# EAGLE board iPad_adapt_board (EAGLE 6.5.0)
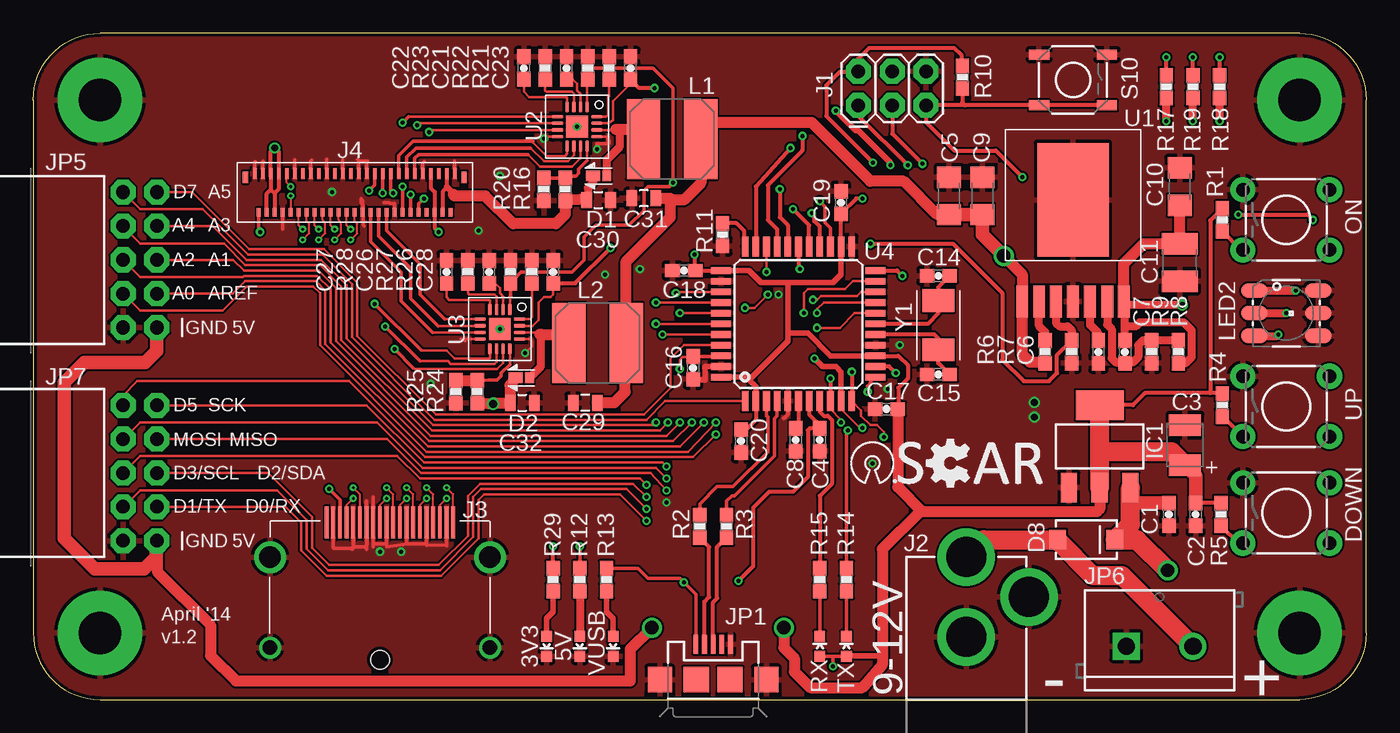
[diagram p0: board, top side]
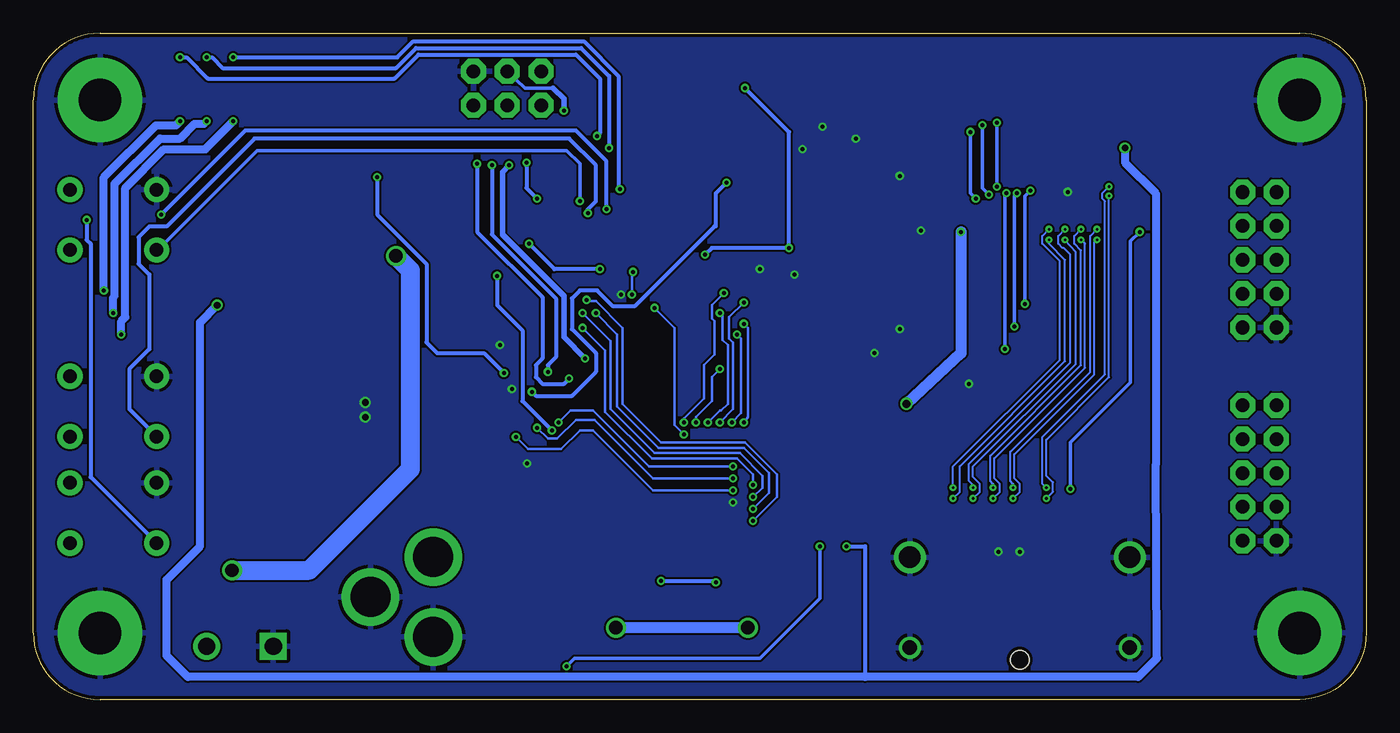
[diagram p1: board, bottom side, seen from below]

Size 100 x 50 mm. Coordinates in mm from the lower left corner, seen from the top.
Outline: 5,0 95,0 arc90 100,5 100,45 arc90 95,50 5,50 arc90 0,45 0,5 arc90 5,0
Copper layers (1*16): Top 0.035mm / dielectric 1.5mm / Bottom 0.035mm
Design rules "SeeedStudio_2layer_DRU_no_angle_20140221 *": minimum track width 0.15mm, minimum drill 7mil, track to track 0.15mm, track to pad 0.15mm, pad to pad 0.15mm, via to via 0.15mm, smd to smd 0mil, copper to edge 10mil, drill to drill 10mil, minimum pad ring 10mil, minimum via ring 6mil, stop-mask expansion 2mil, vias tented up to drill 100mil, thermal gap 10mil

## Footprints (pad centres in the part's own frame; a part is rotated, then mirrored left to right if it is on the bottom)
0603-CAP = smd 1.1 x 1: 1 -0.85,0; 2 0.85,0
SMC_B = smd 1.6 x 2.4: + -1.5,0; - 1.5,0
1206 = smd 1.6 x 1.8: 1 -1.4,0; 2 1.4,0
C1210 = smd 1.6 x 2.7: 1 -1.4,0; 2 1.4,0
0805 = smd 0.8 x 1.2: 1 -0.9,0; 2 0.9,0
SOD1608 = smd 0.65 x 0.8: A -0.625,0 | smd 1.05 x 0.8: C 0.425,0
LED-0603 = smd 0.8 x 0.8: A 0,-0.75; C 0,0.75
SMA-DIODE = smd 1.27 x 1.47: A -2.15,0; C 2.15,0
TACTILE-PTH = drill 1.016 pad 1.88: 1 -3.251,2.261; 2 3.251,2.261; 3 -3.251,-2.261; 4 3.251,-2.261
SOT223 = smd 1.219 x 2.235: 1 -2.311,-3.099; 2 0,-3.099; 3 2.311,-3.099 | smd 3.6 x 2.2: 4 0,3.099
2X3 = drill 1.016 pad 1.88 octagon: 1 0,0; 2 0,2.54; 3 2.54,0; 4 2.54,2.54; 5 5.08,0; 6 5.08,2.54
POWER_JACK_PTH = drill 2.997 pad 4.318: GND 0,7.7; GNDBREAK 4.7,10.7; PWR 0,13.7
DP = smd 0.28 x 2.4: 1 5.5,10.28; 2 5,10.28; 3 4.5,10.28; 4 4,10.28; 5 3.5,10.28; 6 3,10.28; 7 2.5,10.28; 8 2,10.28; 9 1.5,10.28; 10 1,10.28; 11 0.5,10.28; 12 0,10.28; 13 -0.5,10.28; 14 -1,10.28; 15 -1.5,10.28; 16 -2,10.28; 17 -2.5,10.28; 18 -3,10.28; 19 -3.5,10.28; 20 -4,10.28 | drill 1.6: SHIELD1 -8.25,7.68; SHIELD2 8.25,7.68 | drill 1.1: SHIELD3 8.25,0.9; SHIELD4 -8.25,0.9 | hole 1.4: 0,0
MOLEX502250-5191 = smd 0.26 x 0.8: P1 7.485,-1.47; P3 6.885,-1.47; P5 6.285,-1.47; P7 5.685,-1.47; P9 5.085,-1.47; P11 4.485,-1.47; P13 3.885,-1.47; P15 3.285,-1.47; P17 2.685,-1.47; P19 2.085,-1.47; P21 1.485,-1.47; P23 0.885,-1.47; P25 0.285,-1.47; P27 -0.315,-1.47; P29 -0.915,-1.47; P31 -1.515,-1.47; P33 -2.115,-1.47; P35 -2.715,-1.47; P37 -3.315,-1.47; P39 -3.915,-1.47; P41 -4.515,-1.47; P43 -5.115,-1.47; P45 -5.715,-1.47; P47 -6.315,-1.47; P49 -6.915,-1.47; P51 -7.515,-1.47 | smd 0.3 x 0.65: P2 7.185,1.43; P4 6.585,1.43; P6 5.985,1.43; P8 5.385,1.43; P10 4.785,1.43; P12 4.185,1.43; P14 3.585,1.43; P16 2.985,1.43; P18 2.385,1.43; P20 1.785,1.43; P22 1.185,1.43; P24 0.585,1.43; P26 -0.015,1.43; P28 -0.615,1.43; P30 -1.215,1.43; P32 -1.815,1.43; P34 -2.415,1.43; P36 -3.015,1.43; P38 -3.615,1.43; P40 -4.215,1.43; P42 -4.815,1.43; P44 -5.415,1.43; P46 -6.015,1.43; P48 -6.615,1.43; P50 -7.215,1.43 | smd 0.4 x 0.85: P$1 -8.215,-1.195; P$2 8.185,-1.195
USB-MICROB = smd 0.35 x 1.4: D+ 0,2.65; D- -0.65,2.65; GND 1.3,2.65; ID 0.65,2.65; VBUS -1.3,2.65 | smd 1.8 x 1.9: MT1 -4,0; MT2 4,0 | smd 1.9 x 1.9: P$1 -1.27,0; P$2 1.27,0
2X5-RAF = drill 1.016 pad 1.88 octagon: 1 -1.27,5.08; 2 1.27,5.08; 3 -1.27,2.54; 4 1.27,2.54; 5 -1.27,0; 6 1.27,0; 7 -1.27,-2.54; 8 1.27,-2.54; 9 -1.27,-5.08; 10 1.27,-5.08
SCREWTERMINAL-5MM-2 = drill 1.3 pad 2.032 square: 1 0,0 | drill 1.3 pad 2.032: 2 5,0
SRN6045 = smd 2.5 x 6: 1 -2.175,-0.175; 2 2.125,-0.175
LED-TRICOLOR-5050 = smd 2 x 1.1: 1 -2.4,1.7; 2 -2.4,0; 3 -2.4,-1.7; 4 2.4,-1.7; 5 2.4,0; 6 2.4,1.7
0603-RES = smd 1.1 x 1: 1 -0.85,0; 2 0.85,0
STANDOFF-ELECTRICAL = drill 3.2 pad 6.35: P1 0,0
TACTILE_SWITCH_SMD = smd 1.524 x 0.762: 1 -2.54,1.905; 2 2.54,1.905; 3 -2.54,-1.905; 4 2.54,-1.905
TO-PMOD-7 = smd 0.89 x 2.41: 1 -3.81,-7.63; 2 -2.54,-7.63; 3 -1.27,-7.63; 4 0,-7.63; 5 1.27,-7.63; 6 2.57,-7.63; 7 3.81,-7.63 | smd 5.35 x 8.54: EP 0,0
QFN16 = smd 0.85 x 0.28: 1 -1.475,0.75; 2 -1.475,0.25; 3 -1.475,-0.25; 4 -1.475,-0.75; 9 1.475,-0.75; 10 1.475,-0.25; 11 1.475,0.25; 12 1.475,0.75 | smd 0.28 x 0.85: 5 -0.75,-1.475; 6 -0.25,-1.475; 7 0.25,-1.475; 8 0.75,-1.475; 13 0.75,1.475; 14 0.25,1.475; 15 -0.25,1.475; 16 -0.75,1.475 | smd 1.626 x 1.626: PAD 0,0
SPARKFUN-DIGITALIC_TQFP44 = smd 1.5 x 0.5: 1 -5.8,4; 2 -5.8,3.2; 3 -5.8,2.4; 4 -5.8,1.6; 5 -5.8,0.8; 6 -5.8,0; 7 -5.8,-0.8; 8 -5.8,-1.6; 9 -5.8,-2.4; 10 -5.8,-3.2; 11 -5.8,-4; 23 5.8,-4; 24 5.8,-3.2; 25 5.8,-2.4; 26 5.8,-1.6; 27 5.8,-0.8; 28 5.8,0; 29 5.8,0.8; 30 5.8,1.6; 31 5.8,2.4; 32 5.8,3.2; 33 5.8,4 | smd 0.5 x 1.5: 12 -4,-5.8; 13 -3.2,-5.8; 14 -2.4,-5.8; 15 -1.6,-5.8; 16 -0.8,-5.8; 17 0,-5.8; 18 0.8,-5.8; 19 1.6,-5.8; 20 2.4,-5.8; 21 3.2,-5.8; 22 4,-5.8; 34 4,5.8; 35 3.2,5.8; 36 2.4,5.8; 37 1.6,5.8; 38 0.8,5.8; 39 0,5.8; 40 -0.8,5.8; 41 -1.6,5.8; 42 -2.4,5.8; 43 -3.2,5.8; 44 -4,5.8
CRYSTAL-TXC-7A = smd 1.7 x 2.4: P$1 1.85,0; P$2 -1.85,0

## Placement (x,y rotation side)
C1  0.1u  [0603-CAP]  85.2,13.9 270 top
C2  0.1u  [0603-CAP]  87.2,13.9 270 top
C3  22u  [SMC_B]  86.4,19.1 90 top
C4  0.1u  [0603-CAP]  59,19.5 270 top
C5  10u  [1206]  68.7,37.8 90 top
C6  0.022u  [0603-CAP]  79.9,26.1 270 top
C7  0.022u  [0603-CAP]  81.9,26.1 270 top
C8  0.1u  [0603-CAP]  57.2,19.5 90 top
C9  1u  [1206]  71.2,37.8 90 top
C10  1u  [1206]  86,38.5 90 top
C11  100u  [C1210]  86,32.8 270 top
C14  22p  [0603-CAP]  67.9,31.8 0 top
C15  22p  [0603-CAP]  67.9,24.4 0 top
C16  0.1u  [0603-CAP]  49.5,24.9 270 top
C17  1u  [0603-CAP]  64,21.8 180 top
C18  0.1u  [0603-CAP]  48.8,32.2 180 top
C19  0.1u  [0603-CAP]  60.6,37.3 90 top
C20  0.1u  [0603-CAP]  53.1,19.4 270 top
C21  1u  [0603-CAP]  40,47.4 90 top
C22  0.47u  [0603-CAP]  36.8,47.4 90 top
C23  1u  [0603-CAP]  44.8,47.4 90 top
C26  1u  [0603-CAP]  34.2,32.1 90 top
C27  0.47u  [0603-CAP]  31,32.1 90 top
C28  1u  [0603-CAP]  39,32.1 90 top
C29  2.2u  [0805]  41.4,22.27 180 top
C30  4.7u  [0805]  42.41,37.48 0 top
C31  2.2u  [0805]  45.81,37.62 180 top
C32  4.7u  [0805]  36.67,22.27 0 top
CC_TEXT1  CREATIVE_COMMONS  [CREATIVE_COMMONS]  0,0 0 top
D1  PMEG4010EPK  [SOD1608]  42.4,39.3 180 top
D2  PMEG4010EPK  [SOD1608]  36.6,24.15 180 top
D3  GREEN  [LED-0603]  41,4 180 top
D6  GREEN  [LED-0603]  43.5,4 180 top
D8  BA340A  [SMA-DIODE]  79,12 0 top
D9  YELLOW  [LED-0603]  59,4 0 top
D10  YELLOW  [LED-0603]  61,4 0 top
D11  GREEN  [LED-0603]  38.5,4 180 top
DOWN  SWITCH-MOMENTARY-2PTH  [TACTILE-PTH]  94,14 0 top
IC1  5V  [SOT223]  80,19 0 top
J1  AVR_SPI_PRG_6PTH  [2X3]  61.9,44.6 0 top
J2  POWER_JACKPTH  [POWER_JACK_PTH]  70,-3 0 top
J3  DP  [DP]  26,3 0 top
J4  IPAD3-CONN  [MOLEX502250-5191]  24.1,38 180 top
JP1  USB-MICROB  [USB-MICROB]  51,1.5 0 top
JP5  M05X2RAF  [2X5-RAF]  8,33 180 top
JP6  M025MM  [SCREWTERMINAL-5MM-2]  82,4 0 top
JP7  M05X2RAF  [2X5-RAF]  8,17 180 top
L1  4.7uH  [SRN6045]  47.9,41.9 180 top
L2  4.7uH  [SRN6045]  42.3,26.6 180 top
LED2  LED-TRICOLOR-5050NO_IC  [LED-TRICOLOR-5050]  94,29 0 top
ON  SWITCH-MOMENTARY-2PTH  [TACTILE-PTH]  94,36 0 top
R1  10k  [0603-RES]  89.2,36 90 top
R2  22  [0603-RES]  50,13 270 top
R3  22  [0603-RES]  52,13 270 top
R4  10k  [0603-RES]  89.2,22.1 90 top
R5  10k  [0603-RES]  89.1,13.9 90 top
R6  61.9k  [0603-RES]  75.9,26.1 90 top
R7  10k  [0603-RES]  77.9,26.1 90 top
R8  3.32k  [0603-RES]  85.9,26.1 270 top
R9  1.07k  [0603-RES]  83.9,26.1 90 top
R10  10k  [0603-RES]  69.7,46.7 90 top
R11  10k  [0603-RES]  51.7,34.9 90 top
R12  1k  [0603-RES]  41,9 90 top
R13  1k  [0603-RES]  43,9 90 top
R14  1k  [0603-RES]  61,9 90 top
R15  1k  [0603-RES]  59,9 90 top
R16  1M  [0603-RES]  39.9,38.3 270 top
R17  120  [0603-RES]  85,46 90 top
R18  120  [0603-RES]  89,46 90 top
R19  180  [0603-RES]  87,46 90 top
R20  43k  [0603-RES]  38.3,38.3 90 top
R21  1.3M  [0603-RES]  43.2,47.4 90 top
R22  10k  [0603-RES]  41.6,47.4 270 top
R23  57.6k  [0603-RES]  38.4,47.4 270 top
R24  1M  [0603-RES]  33.3,23.1 270 top
R25  43k  [0603-RES]  31.7,23.1 90 top
R26  1.3M  [0603-RES]  37.4,32.1 90 top
R27  10k  [0603-RES]  35.8,32.1 270 top
R28  57.6k  [0603-RES]  32.6,32.1 270 top
R29  560  [0603-RES]  39,9 90 top
S4  STANDOFF_ELECTRICAL  [STANDOFF-ELECTRICAL]  5,45 0 top
S5  STANDOFF_ELECTRICAL  [STANDOFF-ELECTRICAL]  95,45 0 top
S6  STANDOFF_ELECTRICAL  [STANDOFF-ELECTRICAL]  5,5 0 top
S7  STANDOFF_ELECTRICAL  [STANDOFF-ELECTRICAL]  95,5 0 top
S10  RESET  [TACTILE_SWITCH_SMD]  78,46.5 0 top
U1  LMZ12001  [TO-PMOD-7]  78,37.5 0 top
U2  TPS61176  [QFN16]  40.8,43 270 top
U3  TPS61176  [QFN16]  35,27.8 270 top
U4  ATMEGA32U4TQFP  [SPARKFUN-DIGITALIC_TQFP44]  57.4,28.2 90 top
UP  SWITCH-MOMENTARY-2PTH  [TACTILE-PTH]  94,22 0 top
Y1  16MHz  [CRYSTAL-TXC-7A]  67.9,28.1 270 top

## Library data of the parts
C1 C2 C4 C6-C8 C14-C23 C26-C28 R1-R29 = SparkFun-Passives
C3 C11 = rcl
C5 C9 C10 C29-C32 = SparkFun-Capacitors
CC_TEXT1 = SparkFun-Aesthetics
D1 D2 J3 U2 U3 = iPad_adap
D3 D6 D11 = SparkFun-LED; PROD_ID: DIO-00821
D8 = SparkFun-DiscreteSemi; PROD_ID: DIO-09886
D9 D10 = SparkFun-LED; PROD_ID: DIO-09003
DOWN ON S4-S7 UP = SparkFun-Electromechanical
IC1 U1 = SparkFun-PowerIC
J1 J2 JP5-JP7 = SparkFun-Connectors
J4 = con-ipad3
JP1 = SparkFun-Connectors; PROD_ID: CONN-09505
L1 L2 = SparkFun-Passives; PROD_ID: NDUC-11627
LED2 = SparkFun-LED
S10 = SparkFun-Electromechanical; PROD_ID: SWCH-08247
U4 = SparkFun-DigitalIC
Y1 = SparkFun-FreqCtrl

## Nets
0_N: J3.10 J4.P12
0_P: J3.12 J4.P14
1_N: J3.7 J4.P16
1_P: J3.9 J4.P18
2_N: J3.4 J4.P20
2_P: J3.6 J4.P22
3.3V: C7.1 C10.1 C11.1 J4.P4 J4.P5 J4.P6 J4.P7 R8.2 R29.2 U1.7
3_N: J3.1 J4.P24
3_P: J3.3 J4.P26
3V3_EN: R7.2 U1.3 U4.28
+5V: C2.1 C3.+ C17.1 C18.1 C19.1 C20.1 C23.1 C28.1 D9.A D10.A IC1.2 IC1.4 J1.2 JP5.1 JP7.1 R1.2 R4.2 R5.2 R10.2 R12.2 U2.15 U3.15 U4.2 U4.14 U4.24 U4.34 U4.44
A0: JP5.4 U4.36
A1: JP5.5 U4.37
A2: JP5.6 U4.38
A3: JP5.7 U4.39
A4: JP5.8 U4.40
A5: JP5.9 U4.41
AREF: C16.1 JP5.3 U4.42
AUX_N: J3.17 J4.P10
AUX_P: J3.15 J4.P9
BL_PWM: R22.2 R27.2 U2.1 U3.1 U4.12
D0/RX: JP7.3 U4.20
D1/TX: JP7.4 U4.21
D2/SDA: JP7.5 U4.19
D3/SCL: JP7.6 U4.18
D5: JP7.10 U4.31
D7: JP5.10 U4.1
D+: JP1.D+ R3.2
D-: JP1.D- R2.2
GND: C1.2 C2.2 C3.- C4.2 C5.2 C6.2 C8.1 C9.2 C10.2 C11.2 C14.1 C15.1 C16.2 C17.2 C18.2 C19.2 C20.2 C21.2 C22.2 C23.2 C26.2 C27.2 C28.2 C29.2 C30.2 C31.2 C32.2 D3.C D6.C D11.C DOWN.1 IC1.1 J1.6 J2.GND J2.GNDBREAK J3.2 J3.5 J3.8 J3.11 J3.13 J3.14 J3.16 J3.19 J3.SHIELD1 J3.SHIELD2 J3.SHIELD3 J3.SHIELD4 J4.P1 J4.P3 J4.P8 J4.P11 J4.P15 J4.P19 J4.P23 J4.P27 J4.P28 J4.P29 J4.P36 J4.P43 J4.P51 JP1.GND JP1.MT1 JP1.MT2 JP5.2 JP6.1 JP7.2 LED2.4 LED2.5 LED2.6 ON.1 R7.1 R9.1 R11.1 R20.1 R21.2 R22.1 R23.1 R25.1 R26.2 R27.1 R28.1 S4.P1 S5.P1 S6.P1 S7.P1 S10.1 S10.2 U1.4 U1.EP U2.8 U2.13 U2.PAD U3.8 U3.13 U3.PAD U4.5 U4.15 U4.23 U4.35 U4.43 UP.1
HPD: J3.18 J4.P2
LED_BLU: R17.2 U4.29
LED_GRN: R18.2 U4.30
LED_RED: R19.2 U4.32
MISO: J1.1 JP7.7 U4.11
MOSI: J1.4 JP7.8 U4.10
N$1: C6.1 U1.5
N$2: R6.2 U1.2
N$3: C7.2 R8.1 R9.2 U1.6
N$4: J4.P41 U2.11
N$5: C8.2 U4.6
N$6: C14.2 U4.17 Y1.P$2
N$7: J4.P39 U2.10
N$8: C15.2 U4.16 Y1.P$1
N$9: D3.A R12.1
N$10: D6.A R13.1
N$11: R11.2 U4.33
N$12: LED2.1 R18.1
N$13: D10.C R14.1
N$14: D9.C R15.1
N$15: R21.1 U2.16
N$16: LED2.3 R17.1
N$17: LED2.2 R19.1
N$18: D1.A L1.2 U2.14
N$19: C30.1 D1.C J4.P48 J4.P49 R16.2
N$20: R16.1 R20.2 U2.12
N$21: J4.P37 U2.9
N$22: C22.1 U2.4
N$23: R23.2 U2.3
N$24: J4.P42 U2.7
N$25: C21.1 U2.2
N$26: J4.P40 U2.6
N$27: J4.P38 U2.5
N$28: R26.1 U3.16
N$29: D2.A L2.2 U3.14
N$30: J4.P35 U3.11
N$31: R24.1 R25.2 U3.12
N$32: C27.1 U3.4
N$33: R28.2 U3.3
N$34: C26.1 U3.2
N$35: J4.P33 U3.10
N$36: J4.P31 U3.9
N$38: J4.P32 U3.6
N$39: J4.P34 U3.5
N$40: D11.A R29.1
N$41: C32.1 D2.C J4.P45 J4.P46 R24.2
N$42: D8.A J2.PWR JP6.2
N$44: J4.P30 U3.7
RD+: R3.1 U4.4
RD-: R2.1 U4.3
RESET: J1.5 R10.1 S10.3 S10.4 U4.13
RX_LED/SS: R15.2 U4.8
SCK: J1.3 JP7.9 U4.9
SW_1: ON.3 R1.1 U4.25
SW_2: R4.1 U4.26 UP.3
SW_3: DOWN.3 R5.1 U4.27
TX_LED: R14.2 U4.22
VIN: C1.1 C5.1 C9.1 C29.1 C31.1 D8.C IC1.3 L1.1 L2.1 R6.1 U1.1
VUSB: C4.1 JP1.VBUS R13.2 U4.7

## Tracks (layer width: path | path; a pad name or v marks a point on that pad's centre or on a via)
0_N  (via drill 0.2)
  Top 0.15: J3.10 27,15.4 v26.5,15.9 | v20.2,35.3 19.91,35.59 J4.P12
  Bottom 0.15: v26.5,15.9 26.5,16.2 26.7,16.4 26.7,18.6 20.7,24.6 20.7,34.8 v20.2,35.3
0_P  (via drill 0.2)
  Top 0.15: J3.12 26,14.6 v26.5,15.1 | v20.2,34.5 20.7,35 20.7,35.7 20.5,35.9 20.5,36.55 J4.P14
  Bottom 0.15: v26.5,15.1 26,15.6 26,16.2 26.4,16.6 26.4,18.4 20.4,24.4 20.4,34.3 v20.2,34.5
1_N  (via drill 0.2)
  Top 0.15: J3.7 28.5,15.4 v28,15.9 | v21.4,35.3 21.11,35.59 J4.P16
  Bottom 0.15: v28,15.9 28,16.2 28.2,16.4 28.2,18.3 21.4,25.1 21.4,33.7 21.9,34.2 21.9,34.8 v21.4,35.3
1_P  (via drill 0.2)
  Top 0.15: J3.9 27.5,14.6 v28,15.1 | v21.4,34.5 21.9,35 21.9,35.8 21.7,36 21.71,36.02 J4.P18
  Bottom 0.15: v28,15.1 27.5,15.6 27.5,16.2 27.9,16.6 27.9,18.1 21.1,24.9 21.1,34.2 v21.4,34.5
2_N  (via drill 0.2)
  Top 0.15: J3.4 30,15.4 v29.5,15.9 | v22.6,35.3 22.32,35.59 J4.P20
  Bottom 0.15: v29.5,15.9 29.5,16.1 29.8,16.4 29.8,17.7 22.2,25.3 22.2,33.4 22.7,33.9 22.8,33.9 23.1,34.2 23.1,34.8 v22.6,35.3
2_P  (via drill 0.2)
  Top 0.15: J3.6 29,14.6 v29.5,15.1 | v22.6,34.5 23.1,35 23.1,35.8 22.91,35.98 J4.P22
  Bottom 0.15: v29.5,15.1 29,15.6 29,16.2 29.5,16.7 29.5,17.5 21.8,25.2 21.8,33.6 v22.6,34.5
3.3V  (via drill 0.3, 0.5)
  Top 0.3: J4.P7 18.41,38.31 18.1,38 | 18.1,38 18.11,37.98 J4.P6 | J4.P5 17.82,38.28 | 17.82,38.28 18.1,38 | J4.P4 17.52,37.98 17.82,38.28
  Top 0.305: J4.P7 18.41,41.09 v18.1,41.4 17.8,41.1 17.8,39.3 | R29.2 v39,11.5
  Top 0.61: C7.1 81.9,27.9 | 81.9,27.9 81.9,29.78 U1.7 81.8,29.8 82,29.6 v86.2,29.6 | R8.2 86.45,25.25 86.9,25.7 86.9,27.7 86.3,28.3 83,28.3 82.7,28 82,28 81.9,27.9
  Top 0.813: U1.7 81.81,32.71 83.3,34.2 C11.1 C10.1
  Bottom 0.305: v39,11.5 37.6,11.5 37.6,1.7
  Bottom 0.61: v18.1,41.4 18.1,40.3 15.8,38 15.8,17.6 15.7,3.1 17.1,1.7 37.6,1.7 88.4,1.7 90,3.3 90,9 87.5,11.5 87.5,28.3 v86.2,29.6
3_N  (via drill 0.2)
  Top 0.15: J3.1 31.5,15.4 v31,15.9 | v23.8,35.3 23.52,35.59 J4.P24
  Bottom 0.15: v31,15.9 31,17.5 23,25.5 23,32.9 24.3,34.2 24.3,34.8 v23.8,35.3
3_P  (via drill 0.2)
  Top 0.15: J3.3 30.5,14.6 v31,15.1 | v23.8,34.5 23.8,34.47 24.3,34.97 24.3,35.7 24.11,35.88 J4.P26
  Bottom 0.15: v31,15.1 30.5,15.6 30.5,17.5 22.6,25.4 22.6,33 23.8,34.2 v23.8,34.5
3V3_EN  (via drill 0.3)
  Top 0.305: U4.28 57.4,32.4 v57.5,32.3 | v62.8,34.2 69,34.2 72.7,30.5 72.7,25.5 74.3,23.9 76.2,23.9 76.8,24.5 76.8,25.85 R7.2
  Top 0.61: U1.3 76.73,28.27 77,28 77.6,28 77.9,27.7 R7.2
  Bottom 0.305: v57.5,32.3 60.9,32.3 v62.8,34.2
+5V  (via drill 0.3, 1)
  Top 0.2: U2.15 43.15,43.25 43.5,43.5 43.5,44.9 44.8,46.2 | U3.15 37.45,28.05 37.9,28.5 37.9,29.8 38.3,30.2 38.8,30.2 39,30.4 C28.1
  Top 0.254: D10.A 60,3.25 | 60,3.25 D9.A | R12.2 v41,11.5 | v60,2.5 60,3.25 | 44.8,46.2 C23.1
  Top 0.305: 80,14.3 79.8,14.1 | 66.7,14.1 66.5,14.1 | 61.05,3.2 D10.A | R5.2 C2.1 | R4.2 89.15,23 88.3,23 | 88.3,23 83.4,23 82.5,22.1 IC1.4 | R1.2 88.3,35.95 88.3,23 | U4.2 54.2,21 53.45,20.25 C20.1 | U4.34 C18.1 49.6,32.25 v49.6,33.4 | U4.24 C19.1 61.75,37.6 v62.2,37.6 | R10.2 69.65,47.55 69.65,48.35 69.1,48.9 62.7,48.9 61.9,48.1 J1.2 61.86,47.1 60.5,47.1 59.5,46.1 59.5,43.8 v63,40.3 | U4.14 64.9,25.8 65.6,25.1 65.6,24.1 64.9,23.4 64.9,22.65 C17.1 | C28.1 40.65,31.25 v43.3,33.9 | v46.6,45.9 45.45,45.9 C23.1
  Top 0.406: U4.34 53.7,32.2 54.6,31.3 56.6,31.3 | 56.6,31.3 60,31.3 60.6,31.9 U4.24 | U4.14 59.8,25.8 58.1,27.5 56.6,27.5 | 56.6,27.5 56.6,31.3 | U4.44 53.5,24.2 53.7,24 | 53.7,24 54.2,23.5 U4.2 | 56.6,27.5 56.6,26.9 53.7,24 | 61,3.3 61.1,3.3 | 61.1,3.3 63.7,3.3 | D10.A 61.05,3.25 61.1,3.3
  Top 0.813: IC1.4 80,14.3 | 79.8,14.1 66.7,14.1 64.85,15.95 C17.1 | 66.5,14.1 63.7,11.3 63.7,3.3 63.7,2.6 62.3,1 62.2,0.9 58.3,0.9 57.1,2.1 57.1,3.1 56.3,3.9 v56.3,5.4 | JP7.1 9.29,11.9 9.3,11.9 9.3,9.6 13.3,5.6 13.3,3.3 15.2,1.4 44.8,1.4 44.8,3.8 v46.4,5.4
  Top 1.016: C2.1 87.2,16.8 C3.+ | JP5.1 9.27,26.17 8.4,25.3 3.8,25.3 2.3,23.8 2.3,12.1 4.6,9.8 8.3,9.8 9.2,10.7 9.2,11.85 JP7.1
  Top 1.422: IC1.2 80,18.6 | 80,18.6 IC1.4 | C3.+ 85.4,18.6 80,18.6
  Bottom 0.254: v41,11.5 41,7.6 45.5,3.1 59.4,3.1 v60,2.5
  Bottom 0.305: v63,40.3 63,38.4 v62.2,37.6 | v46.6,45.9 43.3,42.6 v43.3,33.9 49.1,33.9 v49.6,33.4
  Bottom 0.813: v46.4,5.4 v56.3,5.4
A0  (via drill 0.3)
  Top 0.2: JP5.4 8,29.2 14.2,29.2 16,31 21,31 21.5,30.5 21.5,26.6 29.5,18.6 49.1,18.6 v51.2,20.8 | v48.2,30.5 48.3,30.6 U4.36
  Bottom 0.2: v51.2,20.8 51.2,21.1 49.7,22.6 49.7,25.1 48.9,25.9 48.9,28.4 49.1,28.6 49.1,29.6 v48.2,30.5
A1  (via drill 0.3)
  Top 0.2: JP5.5 15,33 15.8,32.2 21.4,32.2 22.7,30.9 22.7,26.9 29.8,19.8 47.5,19.8 v48.5,20.8 | v46.7,29.8 U4.37
  Bottom 0.2: v48.5,20.8 47.5,21.8 47.5,26.8 47.8,27.1 47.8,28.7 v46.7,29.8
A2  (via drill 0.3)
  Top 0.2: JP5.6 6.73,32.97 8,31.7 15.7,31.7 15.8,31.8 21.3,31.8 22.3,30.8 22.3,26.8 29.7,19.4 48,19.4 v49.4,20.8 | v48.5,29 U4.38
  Bottom 0.2: v49.4,20.8 48.5,21.7 48.4,21.7 47.9,22.2 47.9,26.6 48.3,27 48.3,28.8 v48.5,29
A3  (via drill 0.3)
  Top 0.2: JP5.7 13.46,35.54 16,33 21.6,33 23.5,31.1 23.5,27.1 30,20.6 46.5,20.6 v46.7,20.8 | v46.7,28.2 U4.39
  Bottom 0.2: v46.7,20.8 46.4,21.2 46.4,27.9 v46.7,28.2
A4  (via drill 0.3)
  Top 0.2: JP5.8 6.73,35.47 8,34.2 14.3,34.2 15.9,32.6 21.5,32.6 23.1,31 23.1,27 29.9,20.2 47,20.2 v47.6,20.8 | v47.2,27.4 U4.40
  Bottom 0.2: v47.6,20.8 46.9,21.5 46.9,27.1 v47.2,27.4
A5
  Top 0.2: JP5.9 11.92,38.08 16.2,33.8 21.8,33.8 24.3,31.3 24.3,27.3 30.2,21.4 45.8,21.4 47.8,23.4 47.8,25.6 48.8,26.6 U4.41
AREF  (via drill 0.3)
  Top 0.2: JP5.3 14.96,30.46 15.9,31.4 21.2,31.4 21.9,30.7 21.9,26.7 29.6,19 48.5,19 v50.3,20.8 | v48.5,24.8 48.5,25.5 48.7,25.7 49.45,25.7 C16.1
  Top 0.305: C16.1 U4.42
  Bottom 0.2: v50.3,20.8 50.3,21.2 49.1,22.4 49.1,24.2 v48.5,24.8
AUX_N  (via drill 0.2)
  Top 0.15: J3.17 23.5,14.6 v24,15.1 | v19.3,37.8 19.3,36.59 J4.P10
  Bottom 0.15: v19.3,37.8 19.3,24.2 24,19.5 24,16.8 23.5,16.3 23.5,15.6 v24,15.1
AUX_P  (via drill 0.2)
  Top 0.15: J3.15 24.5,15.4 v24,15.9 | v19.3,38.5 19.02,38.78 J4.P9
  Bottom 0.15: v24,15.9 24.3,16.2 24.3,19.7 19.6,24.4 19.6,37.4 19.8,37.6 19.8,38 v19.3,38.5
BL_PWM  (via drill 0.3)
  Top 0.2: U2.1 41.55,46.5 | U3.1 35.75,30.25
  Top 0.254: 41.55,46.5 R22.2 41.6,47.2 41.8,47.4 46.5,47.4 48,45.9 v48,38.8 | 35.75,30.25 35.8,30.3 R27.2 35.8,31.3 36.6,32.1 40.4,32.1 41.3,33 41.3,34.7 42.2,35.6 44.7,35.6 45.8,36.7 45.8,38.2 46.1,38.5 47.7,38.5
  Top 0.305: U4.12 62.8,24.2 62.8,23.7 62.6,23.5 v62.6,23.1 | v48,38.8 47.7,38.5
  Bottom 0.305: v62.6,23.1 62.3,22.8 59.6,22.8 57.8,24.6 57.8,26 59.6,27.8 59.6,30.1 59,30.7 57.7,30.7 56.5,29.5 54.9,29.5 48.9,35.5 48.8,35.5 48.8,38 v48,38.8
D0/RX  (via drill 0.3)
  Top 0.2: JP7.3 18.94,14.46 20.1,13.3 20.1,11.2 22,9.3 30.6,9.3 33.4,12.1 33.4,15 33.8,15.4 44,15.4 v46,13.4 | v58.5,30 58.8,30 59.1,30.3 61.8,30.3 62.1,30.6 U4.20
  Bottom 0.2: v46,13.4 44.2,15.2 44.2,16.9 46.6,19.3 52.9,19.3 55.8,22.2 55.8,27.9 57.8,29.9 58.4,29.9 v58.5,30
D1/TX  (via drill 0.3)
  Top 0.2: JP7.4 6.76,14.46 8,15.7 18.3,15.7 20.5,13.5 20.5,11.3 22.1,9.7 30.5,9.7 33,12.2 33,15.2 33.6,15.8 44.5,15.8 v46,14.3 | v57.8,29 57.8,30.5 58.1,30.8 60.9,30.8 61.5,31.4 U4.21
  Bottom 0.2: v46,14.3 44.8,15.5 44.8,17 46.7,18.9 53.1,18.9 56.2,22 56.2,27.4 v57.8,29
D2/SDA  (via drill 0.3)
  Top 0.2: JP7.5 17.6,17 20.9,13.7 20.9,11.4 22.2,10.1 30.4,10.1 32.6,12.3 32.6,15.3 33.5,16.2 45,16.2 v46,15.2 | v58.8,29 58.8,29.3 59.3,29.8 U4.19
  Bottom 0.2: v46,15.2 45.3,15.9 45.3,16.8 47,18.5 53.4,18.5 56.7,21.8 56.7,26.9 v58.8,29
D3/SCL  (via drill 0.3)
  Top 0.2: JP7.6 6.73,17.03 8,18.3 27.3,18.3 29,16.6 45.5,16.6 v46,16.1 | v58.8,27.9 60.5,27.9 61.6,29 U4.18
  Bottom 0.2: v46,16.1 46,16.9 47.2,18.1 53.6,18.1 57.1,21.6 57.1,26.2 v58.8,27.9
D5  (via drill 0.3)
  Top 0.2: JP7.10 6.73,22.83 7.8,23.9 23.7,23.9 29.4,18.2 49.5,18.2 v51.2,19.9 | v53.4,29.4 54.1,29.4 v55.1,30.4 | v55,32.1 U4.31
  Bottom 0.2: v51.2,19.9 51.9,20.6 51.9,27.9 v53.4,29.4 | v55.1,30.4 55.1,32 v55,32.1
D7
  Top 0.2: JP5.10 8,36.8 12.7,36.8 16.1,33.4 21.7,33.4 23.9,31.2 23.9,27.2 30.1,21 46,21 47.4,22.4 U4.1
D+
  Top 0.305: JP1.D+ 51,7.3 51.3,7.6 51.3,11.45 R3.2
D-
  Top 0.305: JP1.D- 50.35,7.35 50.7,7.7 50.7,11.45 R2.2
GND  (via drill 0.3, 0.5)
  Top 0.2: U2.8 38.3,42.25 | U2.13 43.1,42.25 | U3.8 32.05,27.05 32.4,26.9 | U3.13 37.35,27.05 37.4,26.8 37.4,26.5 v36.9,26
  Top 0.254: J4.P36 27.1,36.59 27.1,37.2 26.8,37.2 26.7,37.3 26.3,37.3 | 25.5,15.2 J3.13 25.5,11.65 | 25.5,11.65 25.5,11.47 | J4.P1 16.61,40.34 16.64,40.37 | J4.P3 17.21,40.38 17.23,40.4 | J4.P11 19.61,40.52 19.62,40.53 | J4.P15 20.82,40.42 20.88,40.48 | J4.P19 22.02,40.55 22.02,40.56 | J4.P23 23.21,40.46 23.19,40.48 | J4.P27 24.41,40.43 | 24.41,40.43 24.32,40.53 | J4.P43 29.21,40.27 29.31,40.37 | J4.P51 31.61,40.37 31.59,40.4 | J4.P8 18.71,35.32 18.69,35.3 | J4.P28 24.71,37.45 24.59,37.58 24.59,37.24 24.73,37.09 24.73,35.62 24.82,35.53 | J4.P29 25.02,40.38 25.07,40.42 24.42,40.42 24.41,40.43 | J3.19 22.5,11.4 22.55,11.36 23.85,11.36 23.93,11.28 24,11.36 J3.16 | J3.14 25.02,13.26 25.02,11.27 24.84,11.45 23.98,11.45 24.02,11.47 24.02,13.34 23.98,13.3 23.98,13.23 | 25.5,11.65 25.52,11.7 26.5,11.7 26.5,11.71 J3.11 26.5,13.26 26.5,11.46 28.09,11.67 | 28.09,11.67 28,11.77 J3.8 | J3.5 29.5,13.2 29.5,11.56 | 29.5,11.56 29.45,11.67 28.09,11.67 | J3.2 31,11.52 30.93,11.6 29.5,11.56 | 38.3,42.25 v38.3,42.1 | 43.1,42.25 43.1,42 43.2,42 43.2,41.7 42.3,41.7 v42.3,41.3
  Top 0.305: 25,14.9 J3.14 25,11.6 | U4.5 56.6,21.4 56.3,21.1
  Top 0.406: U4.43 50.4,25 50.4,24 49.5,24 C16.2
  Bottom 0.2: v36.9,26 36.8,26
  other vias: 35,39.3 33.4,35.2 22.4,38.1 64.1,23.3 75.1,22.3 75.1,21.2 29.8,23.7 42.9,31.9 26,11.1 27.6,11.1 55.9,30.4 45.5,32.3 62.96,17.73 65,26.6 47.5,14.8 40.8,43 35,27.8
  pour Bottom: -4,54 104,54 104,-4 -4,-4
  pour Top: -2,52 102,52 102,-2 -2,-2
  cutout Top: 38.7,44.1 39.7,44.1 39.7,45.1 41.9,45.1 41.9,44.1 42.9,44.1 42.9,41.9 41.9,41.9 41.9,40.9 39.7,40.9 39.7,41.9 38.7,41.9
  cutout Top: 33.9,29.9 36.1,29.9 36.1,28.9 37.1,28.9 37.1,26.7 36.1,26.7 36.1,25.7 33.9,25.7 33.9,26.7 32.9,26.7 32.9,28.9 33.9,28.9
HPD  (via drill 0.3)
  Top 0.254: J3.18 23,15 v22.2,15.8 | v17,35.1 16.91,35.19 J4.P2
  Bottom 0.254: v22.2,15.8 22.2,19.3 17.7,23.8 17.7,34.4 v17,35.1
LED_BLU  (via drill 0.3)
  Top 0.305: R17.2 v85,48.2 | v56,38.3 56,36.2 56.6,35.6 U4.29
  Bottom 0.305: v85,48.2 72.7,48.2 71.5,49.4 58.7,49.4 56.1,46.8 56.1,38.4 v56,38.3
LED_GRN  (via drill 0.3)
  Top 0.305: R18.2 v89,48.2 | v57.7,42.3 57.7,41.2 55.1,38.6 55.1,36 55.8,35.3 U4.30
  Bottom 0.305: v89,48.2 88.5,48.2 86.9,46.6 72.9,46.6 71.1,48.4 59.3,48.4 57.5,46.6 57.5,42.5 v57.7,42.3
LED_RED  (via drill 0.3)
  Top 0.305: R19.2 v87,48.2 | v56.8,41.4 54.2,38.5 U4.32
  Bottom 0.305: v87,48.2 86.6,48.2 85.8,47.4 72.8,47.4 71.3,48.9 58.9,48.9 56.8,46.8 v56.8,41.4
MISO  (via drill 0.3)
  Top 0.2: JP7.7 26.56,19.54 29.1,17 46.3,17 v47.5,15.7 | v63.8,19.7 63.8,20.1 63.3,20.6 62.8,20.6 62.1,21.3 62.1,21.7 U4.11
  Top 0.305: J1.1 61.9,43.8 v65.6,40.1 | v61.4,24.6 U4.11
  Bottom 0.2: v63.8,19.7 62.9,18.8 60.4,18.8 59,20.2 58,20.2 53.5,15.7 v47.5,15.7
  Bottom 0.305: v65.6,40.1 65.6,34.9 60.8,30.1 60.8,25.7 61.4,25.1 v61.4,24.6
MOSI  (via drill 0.3)
  Top 0.2: JP7.8 8,20.8 25.8,20.8 29.2,17.4 46.7,17.4 v47.5,16.6 | v62.2,20.4 62,20.4 60.6,21.8 U4.10
  Top 0.406: U4.10 60.6,24.6 60.2,25 59.2,25 v58.6,25.6 | v64.3,40.1 64.3,40.3 61.9,42.7 61.7,42.7 v60.2,44.2
  Bottom 0.2: v62.2,20.4 61.4,19.6 60.7,19.6 59.3,21 57.9,21 53.5,16.6 v47.5,16.6
  Bottom 0.254: 61,45.9 63.1,45.9 J1.4
  Bottom 0.406: v64.3,40.1 64.8,39.6 64.8,34.9 60.2,30.3 60.2,27.2 v58.6,25.6 | v60.2,44.2 60.2,45.1 61,45.9
N$1
  Top 0.61: C6.1 79.9,27.5 79.3,28.1 79.3,29.84 U1.5
N$2
  Top 0.61: R6.2 75.9,27.6 75.46,28.04 U1.2
N$3
  Top 0.61: U1.6 80.57,28.13 80.9,27.8 80.9,25.6 81.2,25.3 81.85,25.3 C7.2 81.95,25.3 82.5,25.3 82.9,25.7 82.9,26.6 83.25,26.95 R9.2 R8.1
N$4
  Top 0.2: 37.1,40.9 38,40 40.4,40 41.05,40.65 U2.11
  Top 0.254: J4.P41 28.61,40.62 28.9,40.9 37.1,40.9
N$5
  Top 0.305: U4.6 57.4,20.75 C8.2
N$6
  Top 0.305: C14.2 67.9,30.95 Y1.P$2 67.9,29 67.1,28.2 U4.17
N$7
  Top 0.2: 37.3,41.4 38.3,40.4 40.1,40.4 40.55,40.85 U2.10
  Top 0.254: J4.P39 28.02,40.72 28.7,41.4 37.3,41.4
N$8
  Top 0.305: C15.2 67.9,25.25 Y1.P$1 67.9,27.1 67.6,27.4 U4.16
N$9
  Top 0.61: R12.1 D3.A
N$10
  Top 0.406: R13.1 43,6.6 43.5,6.1 D6.A
N$11
  Top 0.3: 53.35,34.05 53.35,35.15 52.75,35.75 R11.2
  Top 0.406: 53.35,34.05 U4.33
N$12  (via drill 0.3)
  Top 0.61: LED2.1 v94.7,30.7 | v89,43.4 R18.1
  Bottom 0.61: v94.7,30.7 94.7,39.2 90.8,43.1 89.3,43.1 v89,43.4
N$13
  Top 0.254: D10.C R14.1
N$14
  Top 0.254: R15.1 D9.C
N$15
  Top 0.2: U2.16 42.95,43.75 43.1,43.9 43.1,45.2 43.2,45.3 R21.1
N$16  (via drill 0.3)
  Top 0.61: LED2.3 93.3,27.3 v93.4,27.4 | v85,43.4 R17.1
  Bottom 0.61: v93.4,27.4 93.4,28.4 93.1,28.7 93.1,38.4 90.2,41.3 87.1,41.3 v85,43.4
N$17  (via drill 0.3)
  Top 0.61: LED2.2 v94,29 | v87,43.4 R19.1
  Bottom 0.61: v94,29 94,30.2 93.9,30.3 93.9,38.7 90.5,42.1 89,42.1 87.9,43.2 87.2,43.2 v87,43.4
N$18
  Top 0.2: U2.14 43.45,42.75
  Top 0.254: 43.45,42.75 43.7,42.8
  Top 0.61: D1.A 43.02,40.52 44,41.5 44,42.8
  Top 0.813: 43.7,42.8 44,42.8 45.05,42.8 L1.2
N$19
  Top 0.254: 41.6,37.55 41.53,37.48 C30.1 41.51,37.55 41.5,37.55
  Top 0.3: J4.P49 31.02,38.5 31.02,38.41 30.71,38.12 J4.P48
  Top 0.406: 31.5,37.9 31.5,38.02 31.02,38.5
  Top 0.61: D1.C 41.98,38.77 41.6,38.4 41.6,37.55
  Top 0.813: 41.5,37.55 R16.2 39.9,36.4 39.2,35.7 36,35.7 33.9,37.8 31.6,37.8 31.5,37.9
N$20
  Top 0.2: U2.12 41.55,40.45
  Top 0.254: R20.2 R16.1 39.95,39.3 40.7,39.3 40.9,39.5 40.9,39.8 41.55,40.45
N$21
  Top 0.2: 37.5,41.9 37.5,41.8 38.5,40.8 39.9,40.8 40.05,40.95 U2.9
  Top 0.254: J4.P37 27.41,40.81 28.5,41.9 37.5,41.9
N$22
  Top 0.2: U2.4 40.05,45.15 40,45.2 37.2,45.2 36.8,45.6 C22.1
N$23
  Top 0.2: U2.3 40.55,45.45 40.4,45.6 38.5,45.6 38.4,45.7 R23.2
N$24  (via drill 0.3)
  Top 0.2: U2.7 29.85,42.75
  Top 0.254: 29.85,42.75 v29.7,42.6 | v29.3,37.6 28.91,37.22 J4.P42
  Bottom 0.254: v29.7,42.6 29.7,38 v29.3,37.6
N$25
  Top 0.2: U2.2 41.05,45.45 40.8,45.7 40.8,46.2 40.45,46.55 C21.1
N$26  (via drill 0.3)
  Top 0.2: U2.6 28.95,43.25
  Top 0.254: 28.95,43.25 v28.8,43.1 | v28.3,37.9 28.32,37.91 J4.P40
  Bottom 0.254: v28.8,43.1 28.8,38.4 v28.3,37.9
N$27  (via drill 0.3)
  Top 0.2: U2.5 28.15,43.75
  Top 0.254: 28.15,43.75 v27.7,43.3 | v27.7,38.5 27.7,36.59 J4.P38
  Bottom 0.254: v27.7,43.3 v27.7,38.5
N$28
  Top 0.2: U3.16 37.25,28.55 37.4,28.7 R26.1
N$29
  Top 0.2: U3.14 37.75,27.55
  Top 0.254: 37.75,27.55 38,27.4
  Top 0.61: D2.A 38.09,25 38.1,27.4
  Top 0.813: 38,27.4 38.1,27.4 39.55,27.4 L2.2
N$30  (via drill 0.3)
  Top 0.2: U3.11 35.25,25.25 34.8,24.8 28.6,24.8 28.5,24.9
  Top 0.254: 28.5,24.9 v27.1,26.3 | v27,38 26.82,38.19 J4.P35
  Bottom 0.254: v27.1,26.3 27.1,37.9 v27,38
N$31
  Top 0.2: U3.12 35.75,25.15
  Top 0.254: 35.75,25.15 35.1,24.5 35.1,24.3 34.8,24 34.15,24 R24.1
  Top 0.813: R25.2 R24.1
N$32
  Top 0.2: U3.4 34.25,29.95 34.2,30 31.2,30 31,30.2 C27.1
N$33
  Top 0.2: U3.3 34.75,30.25 34.6,30.4 32.7,30.4 32.6,30.5 R28.2
N$34
  Top 0.2: U3.2 35.25,30.25 35,30.5 35,30.9 34.65,31.25 C26.1
N$35  (via drill 0.3)
  Top 0.2: U3.10 34.75,25.35 34.6,25.2 31.3,25.2 31.1,25.4 29,25.4
  Top 0.254: 29,25.4 v26.4,28 | v26.2,38 26.21,38.02 J4.P33
  Bottom 0.254: v26.4,28 26.4,37.8 v26.2,38
N$36  (via drill 0.3)
  Top 0.2: U3.9 34.25,25.65 34.2,25.6 31.6,25.6 31,26.2 29.1,26.2 29.07,26.23
  Top 0.254: 29.07,26.23 v25.6,29.7 | v25.2,38.2 25.61,38.62 J4.P31
  Bottom 0.254: v25.6,29.7 25.6,37.8 v25.2,38.2
N$37
  cutout Top: 21.93,14.29 31.53,14.27 31.53,12.18 21.93,12.21
N$38
  Top 0.2: 30.35,28.05 U3.6
  Top 0.254: J4.P32 25.91,34.78 28.3,32.4 28.3,30.1 30.35,28.05
N$39
  Top 0.2: 30.85,28.55 U3.5
  Top 0.254: J4.P34 26.52,35.19 29,32.7 29,30.4 30.85,28.55
N$40
  Top 0.406: R29.1 39,6.6 38.5,6.1 D11.A
N$41  (via drill 0.3, 0.6)
  Top 0.3: J4.P45 29.82,38.38 30.11,38.09 J4.P46
  Top 0.305: J4.P46 30.11,35.38 v30.4,35.1
  Top 0.813: D2.C 35.75,23.57 35.77,23.55 C32.1 34.58,22.27 v34.5,22.2 34.15,22.2 R24.2
  Bottom 0.813: v30.4,35.1 30.4,26 v34.5,22.2
N$42
  Top 1.422: J2.PWR 71.3,12 D8.A 76.85,11.95 79.5,9.3 81.7,9.3 JP6.2
N$43
  cutout Top: 16.52,39.77 31.83,39.77 31.83,39.16 16.52,39.16
N$44
  Top 0.2: 29.95,27.55 U3.7
  Top 0.254: J4.P30 25.32,34.38 27.6,32.1 27.6,29.9 29.95,27.55
N$45
  cutout Top: 16.84,36.81 31.41,36.81 31.41,36.3 16.84,36.3
RD+
  Top 0.254: R3.1 52,14.9 52.4,15.3 52.6,15.3 55.6,18.3 55.6,21.1 55.8,21.3 U4.4
RD-
  Top 0.254: R2.1 50,14.7 51.3,16 52.5,16 55.1,18.6 55.1,21.2 55,21.3 U4.3
RESET  (via drill 0.3)
  Top 0.305: S10.4 S10.3 69.9,44.6 | 69.9,44.6 J1.5 66.98,43.32 69.1,41.2 72.2,41.2 v74.2,39.2 | R10.1 69.7,44.8 69.9,44.6 | v64.7,24.5 64.2,25 U4.13
  Bottom 0.305: v64.7,24.5 66.2,26 69.7,26 70.5,26.8 70.5,32.7 74.2,36.4 v74.2,39.2
RX_LED/SS
  Top 0.305: U4.8 59,21.6 59.3,21.3 59.6,21.3 59.9,21 59.9,16.2 59,15.3 R15.2
SCK  (via drill 0.3)
  Top 0.2: JP7.9 25.02,22.08 29.3,17.8 47.2,17.8 v47.5,17.5 | v60.6,20.8 60.6,21 59.8,21.8 U4.9
  Top 0.305: J1.3 64.44,42.46 v66.7,40.2 | v59.8,24.1 U4.9
  Bottom 0.2: v60.6,20.8 59.7,21.7 58,21.7 53.8,17.5 v47.5,17.5
  Bottom 0.305: v66.7,40.2 66.7,35.1 61.8,30.2 61.8,25.6 62.3,25.1 62.3,24.2 61.8,23.7 60.2,23.7 v59.8,24.1
SW_1  (via drill 0.3)
  Top 0.254: v59,37.4 59.4,37 59.4,35.8 59.8,35.4 U4.25
  Top 0.305: R1.1 90.61,33.74 ON.3
  Bottom 0.254: 90.7,33.7 83.2,41.2 60,41.2 59,40.2 v59,37.4
  Bottom 0.305: 90.7,33.7 ON.3
SW_2  (via drill 0.3)
  Top 0.305: UP.3 89.24,21.25 R4.1 | U4.26 59,35.5 58.6,35.9 58.6,36.3 v58.4,36.5
  Bottom 0.305: v58.4,36.5 58.4,36.8 57.8,37.4 57.8,40.1 59.8,42.1 83.4,42.1 90,35.5 91.3,35.5 92.1,34.7 92.1,32.7 91.3,31.9 91.3,26.3 92.8,24.8 92.8,21.79 UP.3
SW_3  (via drill 0.3)
  Top 0.305: R5.1 90.41,11.74 DOWN.3 | U4.27 58.2,35.6 v57,36.8 | v90.4,36.4 95.6,36.4 v96,36
  Bottom 0.305: v57,36.8 57,40.4 59.3,42.7 84.1,42.7 v90.4,36.4 | v96,36 96,34.5 95.7,34.2 95.7,16.69 DOWN.3
TX_LED  (via drill 0.3)
  Top 0.254: v61.1,20.2 61,20.1 R14.2
  Top 0.305: U4.22 64.8,32.2 v65.2,31.8
  Bottom 0.305: v65.2,31.8 65.2,29.6 63.3,27.7 63.3,22.4 v61.1,20.2
VIN  (via drill 1)
  Top 0.61: R6.1 75.85,25.2
  Top 0.813: v72.8,33.3 74.19,31.91 U1.1 74.19,25.91 74.8,25.3 75.85,25.3 R6.1 | 50.08,40.9 L1.1 50,42.15 50,43.3 58.4,43.3 62.8,38.9 65.3,38.9 67.8,36.4 C5.1 | 50.08,40.9 50.08,38.77 48.8,37.5 47.9,37.5 47.8,37.4 | 47.8,37.4 47.8,36.2 44.48,32.88 L2.1 44.4,26.7 44.4,23.1 43.58,22.27 C29.1 | 50.27,40.7 50.08,40.9 | C31.1 47.28,37.62 47.8,37.62 47.8,37.4
  Top 1.016: C1.1 82.36,14.75 82.31,14.8 | C5.1 C9.1 71.2,34.9 v72.8,33.3
  Top 1.422: IC1.3 82.31,14.8 82.31,13.16 D8.C 82.8,12 v85.1,9.7
  Bottom 1.422: v85.1,9.7 79.3,9.7 71.7,17.3 71.7,32.2 v72.8,33.3
VUSB  (via drill 0.3)
  Top 0.254: JP1.VBUS 49.7,7.9 48.95,8.65 | v48.8,8.8 48.5,9.1 46.1,9.1 45.35,9.85 R13.2
  Top 0.305: U4.7 58.2,21.4 58.8,20.8 C4.1 58.25,20.35 58.1,20.2 58.1,16.7 57,15.6 55.2,15.6 54,14.4 54,10 v52.9,8.9 | v48.8,8.8 48.95,8.65
  Bottom 0.305: v52.9,8.9 48.9,8.9 v48.8,8.8

## Text on the board
tNames: U2 | J4 | D7 | A5 | A4 | A3 | D1 | A2 | A1 | A0 | AREF | GND | 5V | U3 | D5 | SCK | D2 | MOSI | MISO | + | D3/SCL | D2/SDA | D1/TX | D0/RX | J3 | GND | 5V | April '14 | v1.2 | 5V | 3V3 | VUSB | RX | TX | 9-12V | - | +